# Altium PCB PCB.PcbDoc
Units mil, origin at the board's own origin, x right, y up, seen from the top; angles counter-clockwise.
Board outline 2283.46 x 1653.54 mil, 2 copper layers (Top Layer, Bottom Layer), stack 61.392 mil thick; 34 components, 22 nets, 85 pads, 33 vias.
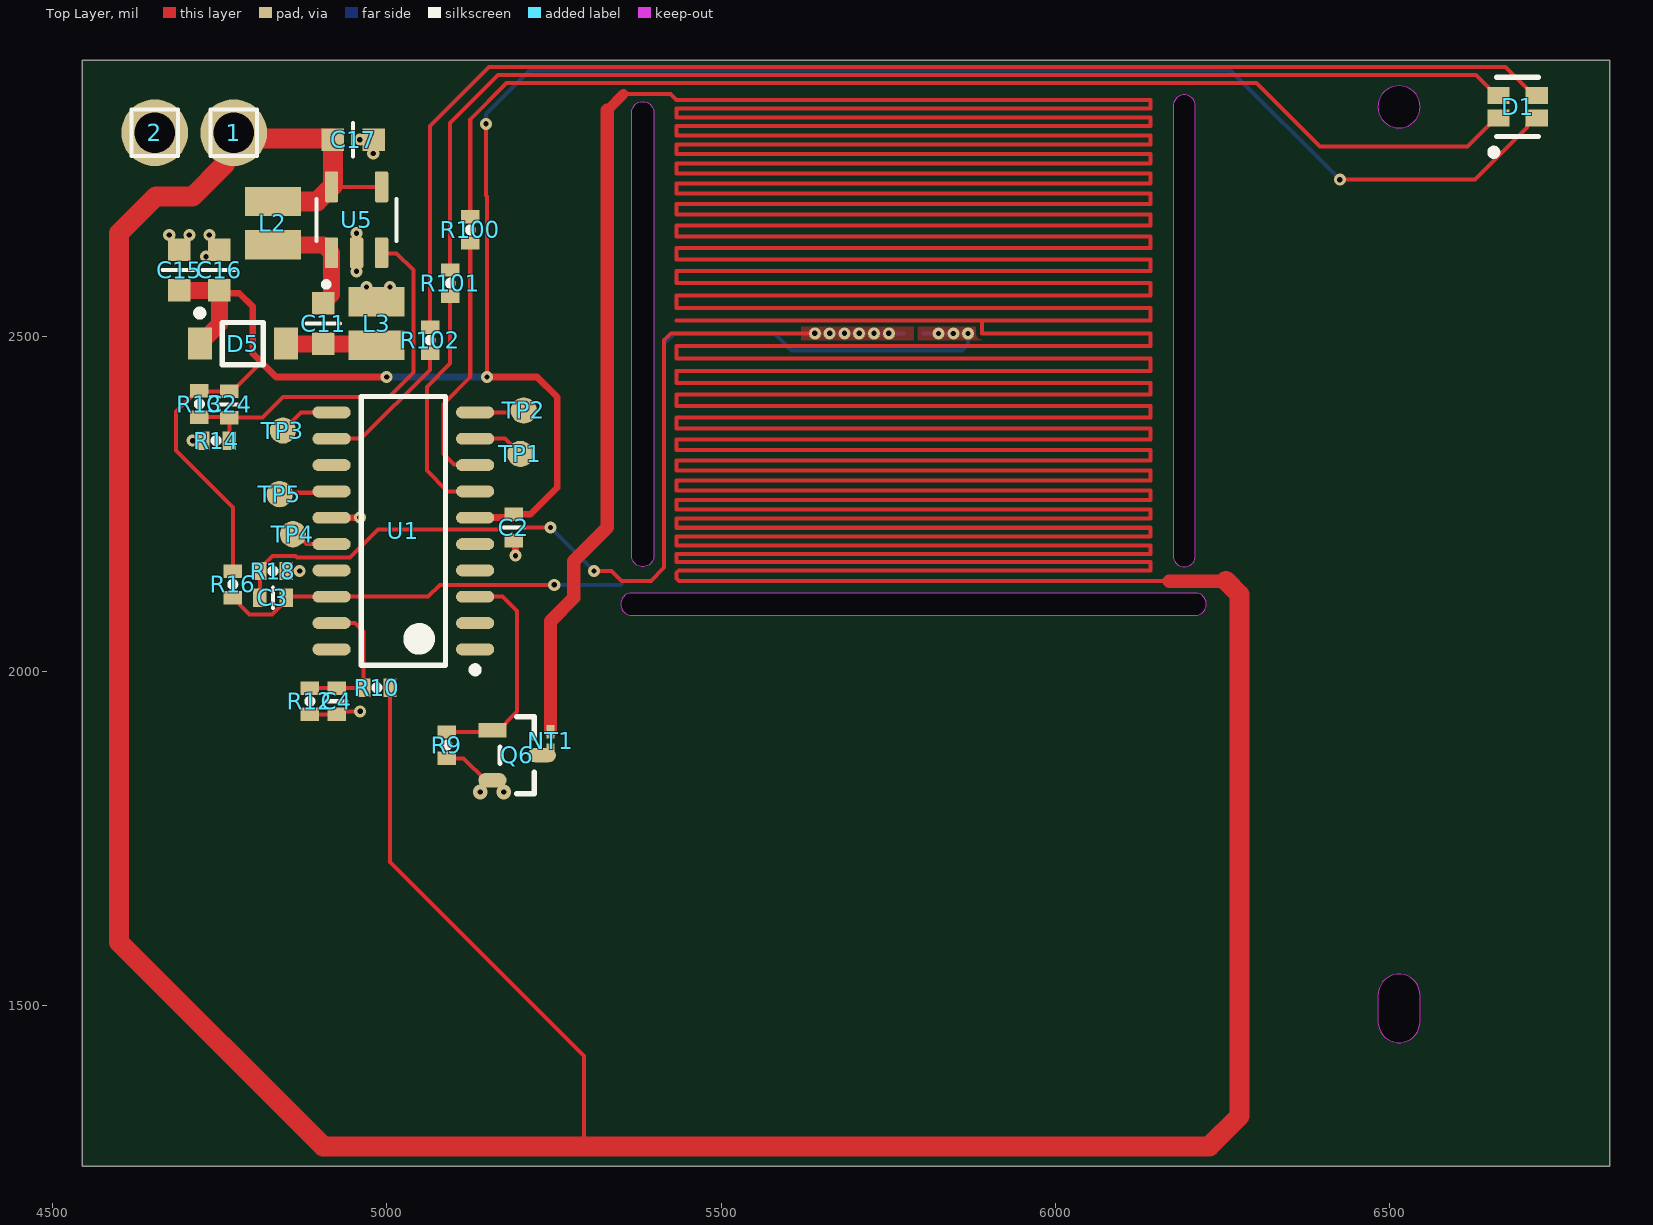
[diagram p0: Top Layer view]
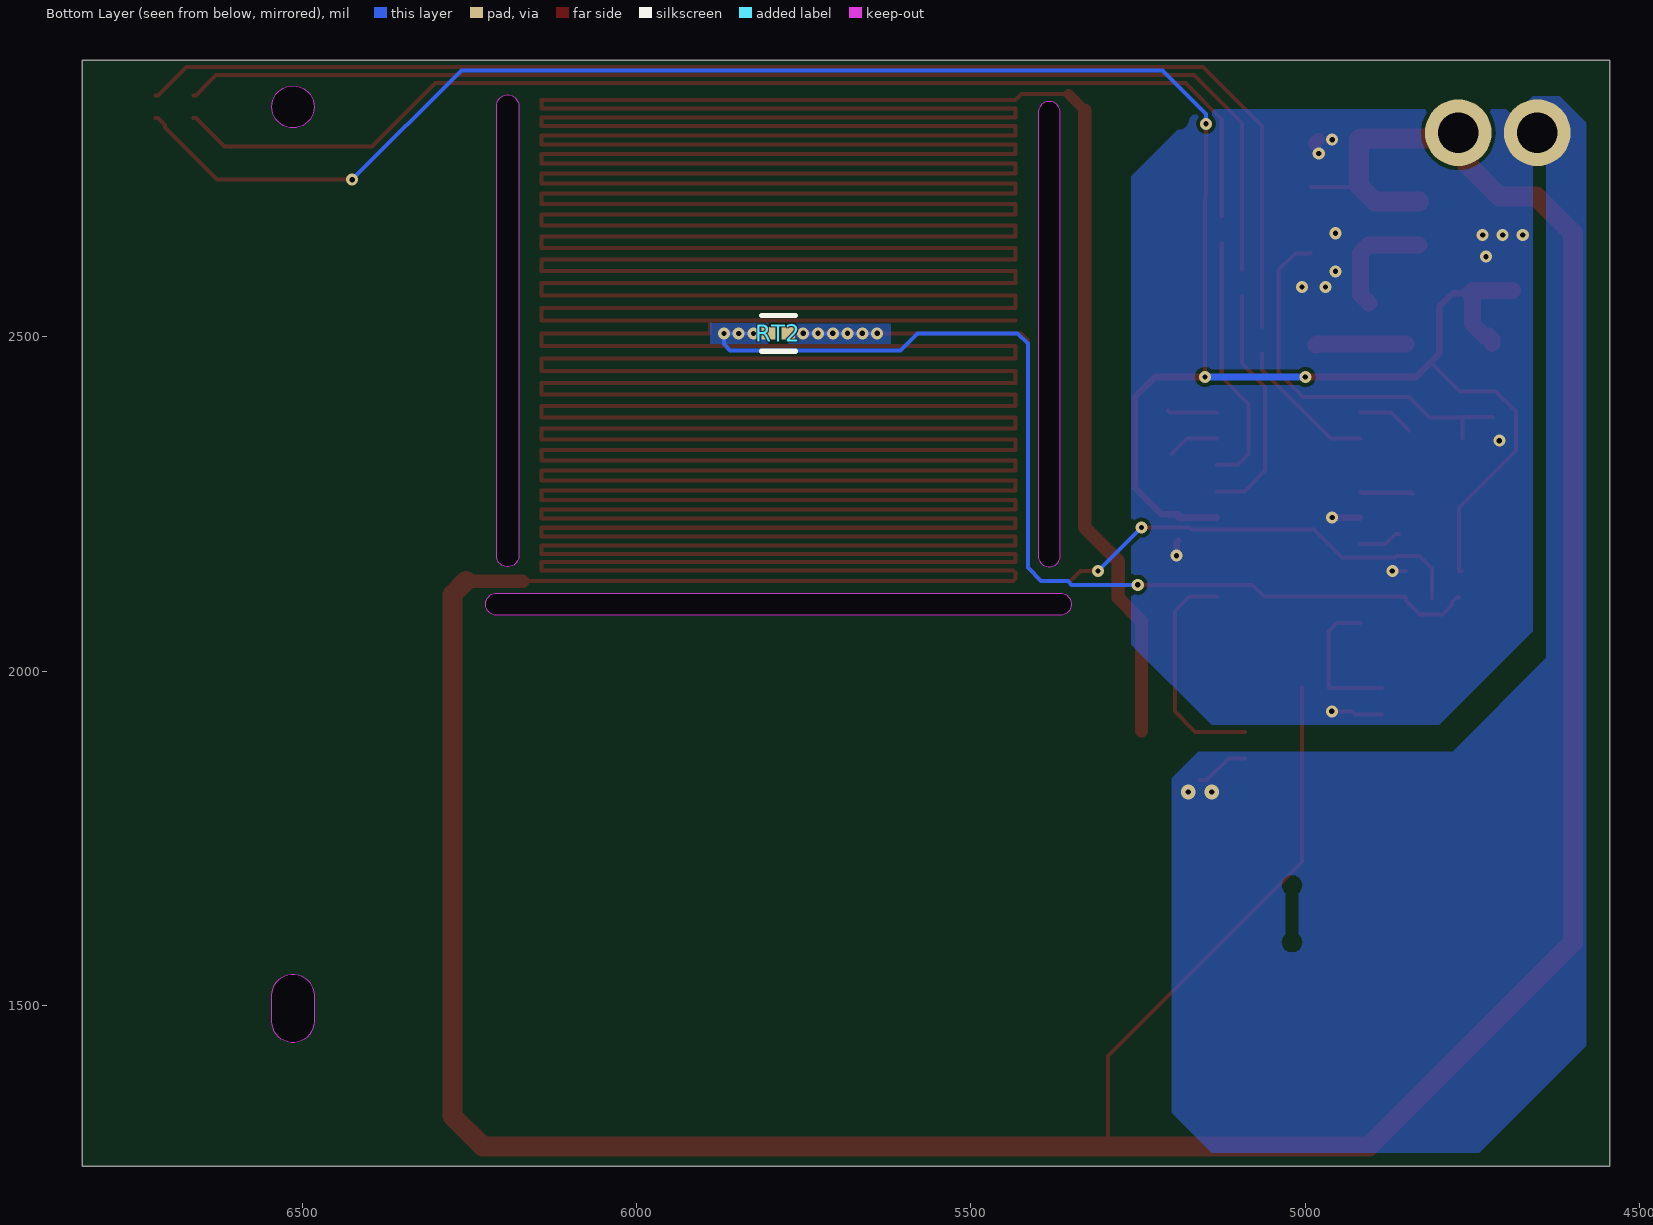
[diagram p1: Bottom Layer view, seen from below]
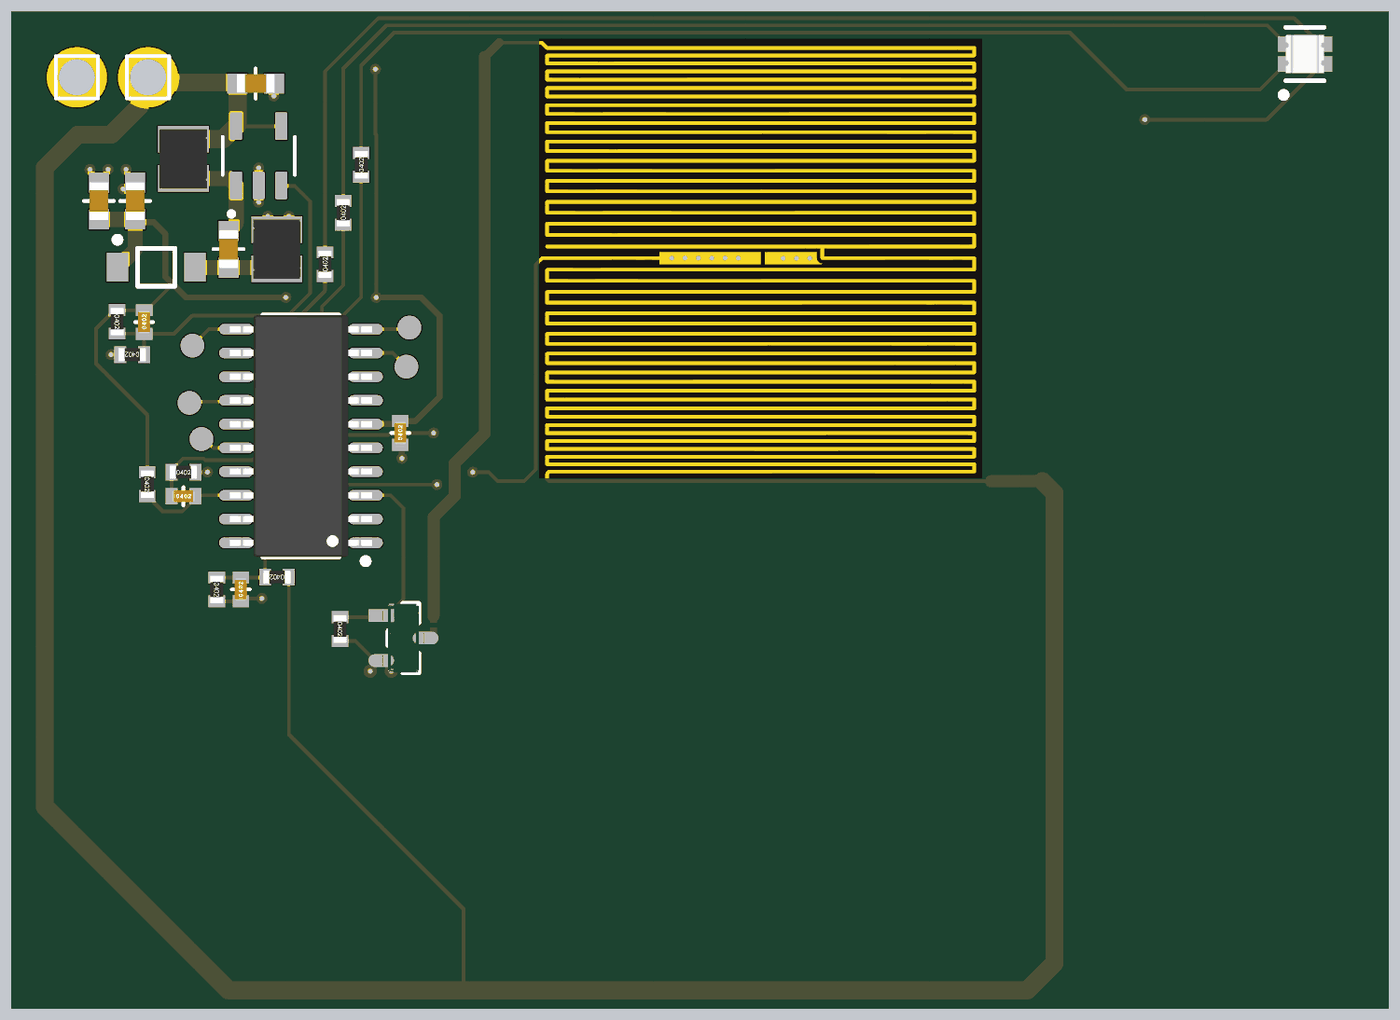
[diagram p2: 3D render of the assembled board from above, using the file's embedded part models]

## Layer stack, top to bottom
Top Solder: solder mask 0.8, Solder Resist, Dk 3.5
Top Layer: signal copper 1.378
Core: core 58.6362, Core-043, Dk 4.3
Bottom Layer: signal copper 1.378
Bottom Solder: solder mask 0.8, Solder Resist, Dk 3.5

## Board outline
4545,1260 6828.46,1260 6828.46,2913.54 4545,2913.54
cut-out: 5366.39,2172.82 5366.39,2835.35 cw(c5382.89,2835.35) 5399.39,2835.35 5399.39,2172.82 cw(c5382.89,2172.82)
cut-out: 5366.39,2083.95 6209.04,2083.95 ccw(c6209.04,2100.45) 6209.04,2116.95 5366.39,2116.95 ccw(c5366.39,2100.45)
cut-out: 6176.04,2172.82 ccw(c6192.54,2172.82) 6209.04,2172.82 6209.04,2845.35 ccw(c6192.54,2845.35) 6176.04,2845.35
cut-out: 6482.01,2843.94 ccw(c6513.5,2843.94) 6513.5,2812.44 ccw(c6513.5,2843.94) 6545,2843.94 ccw(c6513.5,2843.94) 6513.5,2875.44 ccw(c6513.5,2843.94)
cut-out: 6482.01,1476.54 ccw(c6513.5,1476.54) 6545,1476.54 6545,1515.91 ccw(c6513.5,1515.91) 6482.01,1515.91

## Design rules (kind name [scope] priority, off if disabled: settings)
AssemblyTestPointUsage [All] p1 off:
AssemblyTestpoint [All] p1 off: testpointundercomponent=TRUE minsize=40 maxsize=100 preferedsize=60 minholesize=0 maxholesize=40 preferedholesize=32 testpointgrid=1 usegrid=TRUE gridtolerance=0.01 allowsidetop=TRUE allowsidebottom=TRUE
BoardOutlineClearance BoardOutlineClearance-Silk [(OnLayer('Top Overlay') OR OnLayer('Bottom Overlay'))] p1 off: gap=3 ignorepadtopadclearanceinfootprint=FALSE
BoardOutlineClearance [All] p2 off: gap=30 ignorepadtopadclearanceinfootprint=FALSE except(0: Arc-SplitContinuation Track-SplitContinuation SMDPad-SplitContinuation THPad-SplitContinuation Via-SplitContinuation Fill-SplitContinuation Poly-SplitContinuation Region-SplitContinuation Text-OutlineEdge Text-CavityEdge Text-CutoutEdge Text-SplitBarrior Text-SplitContinuation)
Clearance Clearance_KeepOut [IsKeepOut] p1: gap=0.1 ignorepadtopadclearanceinfootprint=FALSE // Clearance for KeepOuts
Clearance [All] p2: gap=6 ignorepadtopadclearanceinfootprint=FALSE except(10: Arc-Hole Track-Hole SMDPad-Hole THPad-Hole Via-Hole Fill-Hole Poly-Hole Region-Hole Text-Hole)
ComponentClearance [All] p1: gap=1 collisioncheckmode=3 verticalgap=10 showdistances=FALSE
DiffPairsRouting DiffPairsRouting-090 [InDifferentialPairClass('All Differential Pairs')] p1 off: maxlimit=20 minlimit=20 mostfreqgap=20 toplayer_minwidth=5 toplayer_maxwidth=59.18 toplayer_prefwidth=42.58 bottomlayer_minwidth=5 bottomlayer_maxwidth=59.18 bottomlayer_prefwidth=42.58 maxuncoupledlength=500
DiffPairsRouting DiffPairsRouting-100 [InDifferentialPairClass('All Differential Pairs')] p2 off: maxlimit=25 minlimit=25 mostfreqgap=25 toplayer_minwidth=5 toplayer_maxwidth=52.19 toplayer_prefwidth=36.98 bottomlayer_minwidth=5 bottomlayer_maxwidth=52.19 bottomlayer_prefwidth=36.98 maxuncoupledlength=500
FabricationTestPointUsage TestPointUsage [All] p1 off: valid=0 allowmultiple=FALSE
FabricationTestpoint Testpoint [All] p1 off: side=3 testpointundercomponent=TRUE minsize=40 maxsize=100 preferedsize=60 minholesize=0 maxholesize=40 preferedholesize=32 testpointgrid=1 allowsidetop=TRUE allowsidebottom=TRUE usegrid=TRUE gridtolerance=0.01
Height 30mil [TouchesRoom('HeightMax_30mil')] p1: minheight=0 maxheight=30 prefheight=20
Height [All] p2: minheight=0 maxheight=2000 prefheight=500
HoleSize [All] p1: absolutevalues=TRUE maxlimit=500 minlimit=8 maxpercent=80.000 minpercent=20.000
HoleToHoleClearance [All] p1: gap=11.25 allowstackedmicrovias=TRUE
MaxMinImpedance [All] p1: minimum=10.00 maximum=150.0
MinimumAnnularRing MinimumAnnularRing_J1 [InComponent('J1')] p1: minimumring=3.25
MinimumAnnularRing MinimumAnnularRing_Lrg_Pad [IsPad and HoleDiameter > 75] p2: minimumring=30
MinimumAnnularRing MinimumAnnularRing_Via [IsVia] p3: minimumring=5
MinimumAnnularRing MinimumAnnularRing_Sml_Pad [All] p4: minimumring=10
MinimumSolderMaskSliver [All] p1: minsoldermaskwidth=4.75
PlaneClearance [All] p1: clearance=15
PlaneConnect [All] p1: planeconnectstyle=Direct reliefexpansion=0 reliefentries=4 reliefconductorwidth=20 reliefairgap=15
PolygonConnect [All] p1: connectstyle=Direct reliefconductorwidth=20 reliefentries=4 polygonreliefangle="45 Angle" airgapwidth=15
RoomDefinition top [InComponentClass('top')] p1 off: confinementstyle=ConfineIn formatcopy=TRUE lockcomponents=FALSE outline 3420,1600 4660,1600 4660,3070 3420,3070
RoutingCorners [All] p1: cornerstyle=45-Degree minsetback=50 maxsetback=50
RoutingVias Via16D32P [All] p1 off: holewidth=16 width=32 viastyle="Through Hole" minholewidth=16 minwidth=32 maxholewidth=16 maxwidth=32
RoutingVias Via12D26P [All] p2 off: holewidth=12 width=26 viastyle="Through Hole" minholewidth=12 minwidth=26 maxholewidth=12 maxwidth=26
RoutingVias Via10D24P [All] p3: holewidth=10 width=24 viastyle="Through Hole" minholewidth=10 minwidth=24 maxholewidth=10 maxwidth=24 useviatemplates=TRUE viatemplateguid#1={15CFB266-487C-44A9-9F42-8BFB84417FAA} viatemplateguid#2={545C9F35-7B06-41DF-9792-B915D163C373} viatemplatename#1=v22h08m13 viatemplatename#2=v24h10m24
RoutingVias Via08D22P [All] p4: holewidth=8 width=18 viastyle="Through Hole" minholewidth=8 minwidth=18 maxholewidth=8 maxwidth=18 viatemplateguid#1={15CFB266-487C-44A9-9F42-8BFB84417FAA} viatemplateguid#2={545C9F35-7B06-41DF-9792-B915D163C373} viatemplatename#1=v22h08m13 viatemplatename#2=v24h10m24
RoutingVias Via20D40P [All] p5 off: holewidth=24 width=40 viastyle="Through Hole" minholewidth=24 minwidth=40 maxholewidth=24 maxwidth=40
SilkToSilkClearance [All] p1 off: silktosilkclearance=0
SilkToSolderMaskClearance SilkscreenOverComponentPads [IsPad] p1 off: minsilkscreentomaskgap=0 clearancetoexposedcopper=FALSE
SolderMaskExpansion [All] p1: expansion=2 istentingtop=FALSE
UnRoutedNet [All] p1: checkbadconnections=TRUE
UnpouredPolygon [All] p1: allowunpoured=TRUE allowshelved=TRUE
Width Width_Serpentine [InNetClass('Heaters')] p1: maxlimit=250 minlimit=5 preferedwidth=19.68 bottomlayer_prefwidth=12 minimp=50.000000 maximp=50.000000 favimp=50.000000
Width Width_Pwr [InNetClass('Pwr')] p2: maxlimit=250 minlimit=5 preferedwidth=20 minimp=50.000000 maximp=50.000000 favimp=50.000000
Width [All] p3: maxlimit=250 minlimit=5 preferedwidth=8
13 further rules are at their usual default settings.

## Components (designator, comment, footprint, x,y, rotation, side; value= is the part's Value field where it differs from the comment)
1 "TP-TH-C-152-H90" TP-TH-C-152-H90 4771.38,2805.28 r90 top
2 "TP-TH-C-152-H90" TP-TH-C-152-H90 4653.27,2805.28 r90 top
C2 "0.10µF" SMD-0402C 5190,2215 r270 top
C3 "0.10µF" SMD-0402C 4830,2110 r180 top
C4 "0.10µF" SMD-0402C 4925.32,1955.32 r270 top
C11 "4.7µF" SMD-0603C 4905,2520 r0 top
C15 "4.7µF" SMD-0603C 4690,2600 r180 top
C16 "4.7µF" SMD-0603C 4750,2600 r180 top
C17 "4.7µF" SMD-0603C 4950,2795 r90 top
C24 "10pF" SMD-0402C 4765,2399.06 r270 top
D1 "LTST-C19HE1WT" FP-LTST-C19HE1WT-MFG 6690.67,2843.94 r90 top locked
D5 "BAT54T1" ONSC-SOD-123-2-425-04_V 4785,2490 r0 top
L2 "SDET25201B-100MS" "WE-LQS 252012"#1 4830,2670 r270 top
L3 "SDET25201B-100MS" "WE-LQS 252012"#2 4985,2520 r90 top
NT1 "2 way net tie junction" 2way_LP 5245,1896 r270 top net-tie
Q6 "NDS355AN / YJL3400A" FP-527AG-01-IPC_C 5195,1874.68 r0 top
R9 "10k" SMD-0402-RES 5090,1889.68 r90 top
R10 "100k" SMD-0402-RES 4985.32,1975.63 r0 top
R12 "100k" SMD-0402-RES 4885.32,1955.32 r90 top
R13 "47k" SMD-0402-RES 4720,2399.68 r90 top value=10k
R14 "28k" SMD-0402-RES 4745,2345 r0 top value=10k
R16 "3.3k" SMD-0402-RES 4770,2130 r90 top
R18 "0.0" SMD-0402-RES 4830,2150 r180 top
R100 "1k" SMD-0402-RES 5125,2660 r270 top
R101 "1k" SMD-0402-RES 5095,2580.32 r270 top
R102 "1k" SMD-0402-RES 5065,2495 r270 top
RT2 "NCP15XH103F03RC" FP-NCP15-NCU15-0_05-IPC_C 5787.72,2505.28 r0 bottom
TP1 "TP-SM-C-100" TP-SM-C-100 5200,2325 r90 top
TP2 "TP-SM-C-100" TP-SM-C-100 5205,2390 r90 top
TP3 "TP-SM-C-100" TP-SM-C-100 4845,2360 r90 top
TP4 "TP-SM-C-100" TP-SM-C-100 4860,2205 r90 top
TP5 "TP-SM-C-100" TP-SM-C-100 4840,2265 r90 top
U1 "PFS123-H20" TSOP100P600X135-20N 5025,2210 r180 top
U5 "AP3015AKTR-G1" SOT95P280X145-5N 4955,2675 r90 top

## Footprints (in the part's own frame and the unit in brackets; to place one, negate y for a bottom-side part, rotate by r counter-clockwise, add the part's x,y. Pads: shape width x height; smd on the part's side, far side on the other; paste and mask are expansions set on the pad)
2way_LP [mil] "2 way low power net tie junction"
  rrect5% 20x12 smd paste-100 mask+4: 1(-14,0) 2(14,0)
FP-527AG-01-IPC_C [mm]
  rect 1.075x0.538 smd paste+0 mask+0: 1(-0.935,0.95)
  rrect100% 1.075x0.538 smd paste+0 mask+0: 2(-0.935,-0.95) 3(0.935,0)
  silkscreen extent -0.65,-1.46 0.65,1.46, body extent -1.57,-1.56 1.57,1.56, height 0.25
FP-LTST-C19HE1WT-MFG [mm]
  rect 0.65x0.85 smd paste+0 mask+0: 1(-0.425,0.725) 2(0.425,0.725) 3(0.425,-0.725) 4(-0.425,-0.725)
  silkscreen extent -1.85,-0.8 1.12,1.02, body extent -0.95,-1.25 0.95,1.25, height 0.25
FP-NCP15-NCU15-0_05-IPC_C [mil]
  rect 20.29x18.6 smd paste+0 mask+0: 1(-14.9,0) 2(14.9,0)
  silkscreen extent -25,-27 25,27, body extent -20,-10 20,10, height 22
ONSC-SOD-123-2-425-04_V [mm] "SOD, 2-Leads, Body 2.69x1.6mm"
  rect 0.91x1.22 smd: 1(-1.635,0) 2(1.635,0)
  silkscreen extent -1.76,-0.8 0.78,1.28, body extent -1.35,-0.8 1.35,0.8, height 1.35
SMD-0402-RES [mm]
  rect 0.508x0.7 smd mask+0.025: 1(-0.5,0) 2(0.5,0)
  silkscreen extent -0.08,-0.08 0.08,0.08, body extent -0.58,-0.28 0.57,0.27, height 0.41
SMD-0402C [mm]
  rect 0.508x0.7 smd mask+0: 1(-0.5,0) 2(0.5,0)
  silkscreen extent 0,-0.38 0,0.38, body extent -0.51,-0.25 0.51,0.25, height 0.51
SMD-0603C [mm]
  rect 0.85x0.85 smd: 1(0,0.775) 2(0,-0.775)
  silkscreen extent -0.64,0 0.64,0, body extent -0.4,-0.8 0.4,0.8, height 0.9
SOT95P280X145-5N [mm]
  rrect25% 1.17x0.51 smd: 1(-1.25,0.95) 2(-1.25,0) 3(-1.25,-0.95) 4(1.25,-0.95) 5(1.25,0.95)
  silkscreen extent -2.55,-1.52 0.8,1.52
TP-SM-C-100 [mm] "Test Point, Surface Mounting, Circular, Pad Diameter 1mm"
  round 1 smd: 1(0,0)
TP-TH-C-152-H90 [mil] "Test Point, Through Hole, Hole Size 0.9mm, PCB Mount with Silkscreen Box"
  round 100 hole 60: 1(0,0)
  silkscreen extent -35,-35 35,35
TSOP100P600X135-20N [mm] "TSOP, 20-Leads, Body 10.00x3.90mm, Pitch 1.00mm, IPC Medium Density"
  oval 1.45x0.45 smd: 1(-2.725,4.5) 2(-2.725,3.5) 3(-2.725,2.5) 4(-2.725,1.5) 5(-2.725,0.5) 6(-2.725,-0.5) 7(-2.725,-1.5) 8(-2.725,-2.5) 9(-2.725,-3.5) 10(-2.725,-4.5) 11(2.725,-4.5) 12(2.725,-3.5) 13(2.725,-2.5) 14(2.725,-1.5) 15(2.725,-0.5) 16(2.725,0.5) 17(2.725,1.5) 18(2.725,2.5) 19(2.725,3.5) 20(2.725,4.5)
  silkscreen extent -2.85,-5.1 1.6,5.4, body extent -3,-5.1 3,5.1, height 1.35
"WE-LQS 252012"#1 [mil] "SMD Power Inductor, 2-Leads, Body 2.5x2.0mm"
  rect 44x84 smd: 1(-32.48,0) 2(32.48,0)
  body extent -49,-39 49,39, height 46
"WE-LQS 252012"#2 [mil] "SMD Power Inductor, 2-Leads, Body 2.5x2.0mm"
  rect 44x84 smd: 1(-32.48,0)
  rect 44x84 smd paste+0: 2(32.48,0)
  body extent -49,-39 49,39, height 46

## Part data
1 2: "Test Point, Through Hole, Hole Size 0.9 mm, PCB Mount with Silkscreen Box"
C2 C3 C4: library part GRM152R61A104KE19D, "CAP CER 0.1UF 10V X5R 0402", Digi-Key Part Number=490-10008-1-ND, Manufacturer="Murata Electronics North America", Operating Temperature="-55°C ~ 85°C", Package / Case="0402 (1005 Metric)", Ratings=-, Temperature Coefficient=X5R, Tolerance=±10%, Voltage=10V, @ qty=0, Applications="General Purpose", Datasheets=http://www.murata.com/~/media/webrenewal/support/library/catalog/products/capacitor/mlcc/c02e.pdf, Factory Stock=0, Features="Derating Recommended", Height - Seated (Max)=-, Image=//media.digikey.com/Renders/Murata%20Renders/ZRB-SERIES-0402.jpg, Lead Spacing=-, Lead Style=-, Minimum Quantity=1, Mounting Type="Surface Mount, MLCC", Packaging="Cut Tape (CT)", Part Number=GRM152R61A104KE19D, Part Status=Active, Quantity Available=80241, Series=GRM, Size / Dimension="0.039\" L x 0.020\" W (1.00mm x 0.50mm)", Thickness (Max)="0.009\" (0.22mm)", Unit Price (USD)=0.16
C11 C15 C16 C17: library part GRM185C81A475KE11D, "CAP CER 4.7UF 10V X6S 0603", Digi-Key Part Number=490-10464-1-ND, Manufacturer="Murata Electronics North America", Operating Temperature="-55°C ~ 105°C", Package / Case="0603 (1608 Metric)", Ratings=-, Temperature Coefficient=X6S, Tolerance=±10%, Voltage=10V, @ qty=0, Applications="General Purpose", Datasheets=http://www.murata.com/~/media/webrenewal/support/library/catalog/products/capacitor/mlcc/c02e.pdf, Factory Stock=0, Features="Derating Recommended", Height - Seated (Max)=-, Image=//media.digikey.com/Renders/Murata%20Renders/ZRB-SERIES-0402.jpg, Lead Spacing=-, Lead Style=-, Minimum Quantity=1, Mounting Type="Surface Mount, MLCC", Packaging="Cut Tape (CT)", Part Number=GRM185C81A475KE11D, Part Status=Active, Quantity Available=1360, Series=GRM, Size / Dimension="0.063\" L x 0.031\" W (1.60mm x 0.80mm)", Thickness (Max)="0.022\" (0.55mm)", Unit Price (USD)=0.51
C24: library part GCM1555C1H100JA16D, "CAP CER 10PF 50V NP0 0402", Digi-Key Part Number=490-10668-1-ND, Manufacturer="Murata Electronics North America", Operating Temperature="-55°C ~ 125°C", Package / Case="0402 (1005 Metric)", Ratings=AEC-Q200, Temperature Coefficient="C0G, NP0", Tolerance=±5%, Voltage=50V, @ qty=0, Applications=Automotive, Datasheets=http://www.murata.com/~/media/webrenewal/support/library/catalog/products/capacitor/mlcc/c03e.ashx, Factory Stock=0, Features=-, Height - Seated (Max)=-, Image=//media.digikey.com/Renders/Murata%20Renders/ZRB-SERIES-0402.jpg, Lead Spacing=-, Lead Style=-, Minimum Quantity=1, Mounting Type="Surface Mount, MLCC", Packaging="Cut Tape (CT)", Part Number=GCM1555C1H100JA16D, Part Status=Active, Quantity Available=966, Series=GCM, Size / Dimension="0.039\" L x 0.020\" W (1.00mm x 0.50mm)", Thickness (Max)="0.022\" (0.55mm)", Unit Price (USD)=0.1
D1: library part CMP-2000-05201-2, "LED RGB DIFFUSED CHIP SMD", Case Code (Imperial)=0606, Case Code (Metric)=1616, Color=Blue, Forward Current=20mA, Forward Voltage=3.35V, Lens Color=White, Max Operating Temperature=80°C, Min Operating Temperature=-20°C, Package Quantity=3000, Reverse Voltage=5V, Case/Package=0606, Depth=1.6mm, Dominant Wavelength=470nm, Height=0.35mm, Lead Free="Lead Free", Length=1.6mm, Lens Style=Diffused, Lens Transparency=Diffused, Luminous Intensity=180mcd, Mount="Surface Mount", Number of Elements=3, Number of LEDs=3, Number of Pins=4, Packaging="Tape and Reel", Radiation Hardening=No, Test Current=20mA, Viewing Angle=130°, Width=1.6mm
D5: library part CMP-1055-00428-1, "Schottky Barrier Diode, 2-Pin SOD-123, Tape and Reel", Manufacturer="On Semiconductor", ComponentLink1Description="Manufacturer URL", ComponentLink1URL=http://www.onsemi.com/, ComponentLink2Description=Datasheet, ComponentLink2URL=http://www.onsemi.cn/pub_link/Collateral/BAT54T1-D.PDF, ComponentLink3Description="Package Specification", ComponentLink3URL=http://www.onsemi.com/pub_link/Collateral/425-04.PDF, Configuration=Single, DatasheetVersion="Rev. 9", IFSM Max (A)=0.6, Mounting Technology="Surface Mount", PackageDescription="2-Pin SOD, Body 1.6 x 2.69 mm", PackageReference=SOD-123-2-425-04, PackageVersion="Rev. G, 10/2009", Packing="Tape and Reel", PartNumber=BAT54T1, RoHS=FALSE, trr Max (ns)=5
L2 L3: library part CMP-1354-00007-1, "FIXED IND 10UH 900MA 408MOHM SMD", Inductance="10.0 ÂµH", Manufacturer="Wuerth Elektronik", PartNumber=74404024100, ComponentLink1Description="Manufacturer URL", ComponentLink1URL=http://www.we-online.com, ComponentLink2Description=Datasheet, ComponentLink2URL=http://katalog.we-online.de/pbs/datasheet/74404024100.pdf, PackageReference="WE-LQS 252012"
NT1: library part 2way, ComponentLink1Description=Source, ComponentLink1URL=http://www.edatools.cz/addons, FootprintNote="LP=12mil, MP=40mil, HP=120mil"
Q6: library part CMP-2000-06834-2, "MOSFET N-CH 30V 1.7A SSOT3", Continuous Drain Current=1.7A, Drain To Source Breakdown Voltage=30V, Drain To Source Resistance=0.105Ω, Gate To Source Voltage=20V, Input Capacitace At Vds="195pF @ 15V", Manufacturer="ON Semiconductor", Manufacturer Part Number=NDS355AN, Max Forward Diode Voltage=1.2V, Max Junction Temp=+150°C, Package=527AG-01, Power Dissipation=0.46W, Pulse Drain Current=10A, Temperature="-55°C to +150°C", Temperature Range Low=-55°C, Typ Forward Diode Voltage=0.8V, Automotive=No, Category=Trans, ComponentLink2Description=Datasheet, ComponentLink2URL=https://www.onsemi.com/pub/Collateral/NDS355AN-D.PDF, Depletion Mode=False, Device Class L1="Discrete Semiconductors", Device Class L2=Transistors, Device Class L3=MOSFETs, Digikey Description="MOSFET N-CH 30V 1.7A SSOT3", Drain To Source Voltage=30V, Footprint Url=https://www.onsemi.com/pub/Collateral/527AG.PDF, Gate Charge At Vgs="3.5nC @ 5V", Height=1.22mm, Lead Free=Yes, Mouser Description="MOSFET SOT-23 N-CH LOGIC", Number of Channels=1, Number Of N Channels=1, Octopart=https://octopart.com/nds355an-on+semiconductor-84330922, RoHS=TRUE, Rthja Max=250°C/W, Standoff Height=0.013mm, Temperature Range High=+150°C, Threshold Vgs Max=2V, Threshold Vgs Min=1V, Transconductance=3.5S, Turn Off Delay Time=13ns, Turn On Delay Time=10ns
R9 R13 R14: library part ERJ-2GEJ103X, "RES SMD 10K OHM 5% 1/10W 0402", Digi-Key Part Number=P10KJCT-ND, Manufacturer="Panasonic Electronic Components", Operating Temperature="-55°C ~ 155°C", Package / Case="0402 (1005 Metric)", Power (Watts)="0.1W, 1/10W", Supplier Device Package=0402, Temperature Coefficient=±200ppm/°C, Tolerance=±5%, @ qty=1500, Composition="Thick Film", Datasheets=http://industrial.panasonic.com/www-cgi/jvcr13pz.cgi?E+PZ+3+AOA0001+ERJ2GEJ103X+7+WW, Factory Stock=0, Failure Rate=-, Features="Automotive AEC-Q200", Height - Seated (Max)="0.016\" (0.40mm)", Image=//media.digikey.com/Photos/Panasonic%20Photos/ERJ-PA2-Series.jpg, Minimum Quantity=1, Number of Terminations=2, Packaging="Cut Tape (CT)", Part Number=ERJ-2GEJ103X, Part Status=Active, Quantity Available=2560215, Series=ERJ, Size / Dimension="0.039\" L x 0.020\" W (1.00mm x 0.50mm)", Unit Price (USD)=0.00350
R10 R12: library part ERJ-2GEJ104X, "RES SMD 100K OHM 5% 1/10W 0402", Digi-Key Part Number=P100KJCT-ND, Manufacturer="Panasonic Electronic Components", Operating Temperature="-55°C ~ 155°C", Package / Case="0402 (1005 Metric)", Power (Watts)="0.1W, 1/10W", Supplier Device Package=0402, Temperature Coefficient=±200ppm/°C, Tolerance=±5%, @ qty=1500, Composition="Thick Film", Datasheets=http://industrial.panasonic.com/www-cgi/jvcr13pz.cgi?E+PZ+3+AOA0001+ERJ2GEJ104X+7+WW, Factory Stock=0, Failure Rate=-, Features="Automotive AEC-Q200", Height - Seated (Max)="0.016\" (0.40mm)", Image=//media.digikey.com/Photos/Panasonic%20Photos/ERJ-PA2-Series.jpg, Minimum Quantity=1, Number of Terminations=2, Packaging="Cut Tape (CT)", Part Number=ERJ-2GEJ104X, Part Status=Active, Quantity Available=2387986, Series=ERJ, Size / Dimension="0.039\" L x 0.020\" W (1.00mm x 0.50mm)", Unit Price (USD)=0.00350
R16: library part ERJ-2GEJ332X, "RES SMD 3.3K OHM 5% 1/10W 0402", Digi-Key Part Number=P3.3KJCT-ND, Manufacturer="Panasonic Electronic Components", Operating Temperature="-55°C ~ 155°C", Package / Case="0402 (1005 Metric)", Power (Watts)="0.1W, 1/10W", Supplier Device Package=0402, Temperature Coefficient=±200ppm/°C, Tolerance=±5%, @ qty=1500, Composition="Thick Film", Datasheets=http://industrial.panasonic.com/www-cgi/jvcr13pz.cgi?E+PZ+3+AOA0001+ERJ2GEJ332X+7+WW, Factory Stock=0, Failure Rate=-, Features="Automotive AEC-Q200", Height - Seated (Max)="0.016\" (0.40mm)", Image=//media.digikey.com/Photos/Panasonic%20Photos/ERJ-PA2-Series.jpg, Minimum Quantity=1, Number of Terminations=2, Packaging="Cut Tape (CT)", Part Number=ERJ-2GEJ332X, Part Status=Active, Quantity Available=514266, Series=ERJ, Size / Dimension="0.039\" L x 0.020\" W (1.00mm x 0.50mm)", Unit Price (USD)=0.00350
R18: library part ERJ-2GE0R00X, "RES SMD 0.0OHM JUMPER 1/10W 0402", Digi-Key Part Number=P0.0JCT-ND, Manufacturer="Panasonic Electronic Components", Operating Temperature="-55°C ~ 155°C", Package / Case="0402 (1005 Metric)", Power (Watts)="0.1W, 1/10W", Supplier Device Package=0402, Temperature Coefficient=-, Tolerance=Jumper, @ qty=1500, Composition="Thick Film", Datasheets=http://industrial.panasonic.com/www-cgi/jvcr13pz.cgi?E+PZ+3+AOA0001+ERJ2GE0R00X+7+WW, Factory Stock=0, Failure Rate=-, Features="Automotive AEC-Q200", Height - Seated (Max)="0.016\" (0.40mm)", Image=//media.digikey.com/Photos/Panasonic%20Photos/ERJ-PA2-Series.jpg, Minimum Quantity=1, Number of Terminations=2, Packaging="Cut Tape (CT)", Part Number=ERJ-2GE0R00X, Part Status=Active, Quantity Available=3152483, Series=ERJ, Size / Dimension="0.039\" L x 0.020\" W (1.00mm x 0.50mm)", Unit Price (USD)=0.00384
R100 R101 R102: library part ERJ-2GEJ102X, "RES SMD 1K OHM 5% 1/10W 0402", Digi-Key Part Number=P1.0KJCT-ND, Manufacturer="Panasonic Electronic Components", Operating Temperature="-55°C ~ 155°C", Package / Case="0402 (1005 Metric)", Power (Watts)="0.1W, 1/10W", Supplier Device Package=0402, Temperature Coefficient=±200ppm/°C, Tolerance=±5%, @ qty=1500, Composition="Thick Film", Datasheets=http://industrial.panasonic.com/www-cgi/jvcr13pz.cgi?E+PZ+3+AOA0001+ERJ2GEJ102X+7+WW, Factory Stock=0, Failure Rate=-, Features="Automotive AEC-Q200", Height - Seated (Max)="0.016\" (0.40mm)", Image=//media.digikey.com/Photos/Panasonic%20Photos/ERJ-PA2-Series.jpg, Minimum Quantity=1, Number of Terminations=2, Packaging="Cut Tape (CT)", Part Number=ERJ-2GEJ102X, Part Status=Active, Quantity Available=1939857, Series=ERJ, Size / Dimension="0.039\" L x 0.020\" W (1.00mm x 0.50mm)", Unit Price (USD)=0.00350
RT2: library part CMP-06022-000003-3, "NTC Thermistor for Temperature Sensor, 0402, 10kΩ, 1%, 0.1mA, 5V", Case Code (Imperial)=0402, Case Code (Metric)=1005, Current Rating=310uA, Max Operating Temperature=125°C, Max Power Dissipation=100mW, Min Operating Temperature=-40°C, Package Quantity=10000, Resistance=10kR, Resistance Tolerance=1%, Case/Package=0402, Depth=0.5mm, Height=0.5mm, Lead Free="Lead Free", Length=1mm, Mount="Surface Mount", Number of Pins=2, Packaging="Tape and Reel", Power Rating=100mW, Radiation Hardening=No, REACH SVHC="No SVHC", RoHS Compliant=Yes, Series=NCP, Termination=SMD/SMT, Tolerance=1%
TP1 TP2 TP3 TP4 TP5: library part CMP-0484-00002-2, "Test Point, Surface Mount, Circular, Pad Diameter 1 mm", Manufacturer="No Vendor", PartNumber=TP-SM-C-100
U5: "Boost Switching Regulator IC Positive Adjustable 1.23V 1 Output 75mA (Switch) SC-74A, SOT-753", Package="SOT-23-5 Diodes Inc.", Availability=Good, Check_prices=https://www.snapeda.com/parts/AP3015AKTR-G1/Diodes%20Inc./view-part/490813/?ref=eda, DigiKey-Purchase-URL=https://snapeda.com/shop?store=DigiKey&id=490813, MF="Diodes Inc.", Mouser-Purchase-URL=https://snapeda.com/shop?store=Mouser&id=490813, MP=AP3015AKTR-G1, Price=None, SnapEDA_Link=https://www.snapeda.com/parts/AP3015AKTR-G1/Diodes%20Inc./view-part/490813/?ref=snap

## Via types
v1: diameter 18, hole 8, Top Layer to Bottom Layer, tented both sides, 31 vias
v2: diameter 22, hole 8, Top Layer to Bottom Layer, tented both sides, 2 vias

## Nets (pads, with @x,y where several pads share a name; then routed paths per layer and width w, separated by ;. In a path a pad name is that pad's centre, name@x,y a point inside that pad or via, vN(x,y) a via of type N, cw(c..) or ccw(c..) an arc to the next point about the centre after c; other vN are vias at no path point)
GND: 2.1 C2.2 C4.2 C15.2 C16.2 C17.2 L3.2 Q6.2 R9.1 R12.1 R14.1 R18.1 U1.15 U5.2 | length 257.1
  Top Layer w6: R18.1 v1(4870,2150) ; R12.1 C4.2 ; U1.15 U1.15@4917.87,2229.84 ; C4.2@4925.47,1935.79 4930,1940.32 v1(4960.32,1940.32) ; v1@4959.84,2229.84 v1(4960,2230) ; R9.1 5114.91,1870 5147.63,1837.28 Q6.2 ; v1(5192.63,2172.99) v1@5195.62,2170
  Top Layer w10: U1.15@4917.87,2229.84 v1@4959.84,2229.84 ; C2.2 5192.63,2192.68 v1(5192.63,2172.99)
  Top Layer w20: C17.2 C17.2@4986.34,2789.18
  other v1: 4710,2345 4970,2574.61 5005,2574.61 4955,2598 4730,2620 4675,2652.4 4705,2652.4 4735,2652.4 4955,2655 4980,2774.17 4960,2795
  other v2: 5140,1819.68 5175,1819.68
HEATER_PWM1: Q6.1 R9.2 U1.3 | length 339.5
  Top Layer w6: R9.2 5164.69,1909.37 5195,1939.68 5195,2090 5173.43,2111.57 U1.3
ICPCK: TP3.1 U1.11 | length 84
  Top Layer w6: TP3.1 4872.17,2387.17 U1.11
ICPDA: TP1.1 U1.9 | length 77.2
  Top Layer w6: U1.9 5177.2,2347.8 TP1.1
ICVPP: TP2.1 U1.10 | length 73.9
  Top Layer w6: U1.10 5202.17,2387.17 TP2.1
LED_BLUEn: R102.2 U1.12 | length 214.5
  Top Layer w6: U1.12 4962.01,2347.8 5064.83,2450.62 5064.83,2475.14 R102.2
LED_GRNn: R101.2 U1.7 | length 360.2
  Top Layer w6: R101.2 5095,2460 5060,2425 5060,2300 5090.94,2269.06 U1.7
LED_REDn: R100.2 U1.8 | length 386
  Top Layer w6: R100.2 5125,2440 5085,2400 5085,2325 5100.46,2309.54 5131.17,2309.54 U1.8
NetC11_1: C11.1 L2.2 U5.1 | length 173
  Top Layer w25: L2.2 4905.87,2637.52 U5.1 4917.6,2563.11 C11.1
NetC11_2: C11.2 D5.2 L3.1 | length 136.5
  Top Layer w25: D5.2@4849.37,2489.37 4904.88,2489.37 C11.2 4983.03,2489.49 L3.1
NetC24_2: C24.2 R13.1 R14.2 U5.3 | length 589.8
  Top Layer w6: R13.1 C24.2@4765,2380 ; R14.2@4765,2349.06 C24.2 4814.37,2379.37 4845,2410 5003.28,2410 5040,2446.72 5040,2600 5015,2625 4993.19,2625 U5.3
NetD1_1: D1.1 R100.1 | length 1761.5
  Top Layer w6: R100.1 5125,2825 5179.35,2879.35 6300.65,2879.35 6395,2785 6615.98,2785 6658.19,2827.21 D1.1
NetD1_2: D1.2 R101.1 | length 1830
  Top Layer w6: R101.1 5095,2820 5166.35,2891.35 6628.49,2891.35 6648.39,2871.45 6648.39,2870.47 6658.19,2860.67 D1.2
NetD1_3: D1.3 R102.1 | length 2008.8
  Top Layer w6: R102.1 5065,2815 5153.35,2903.35 6672.6,2903.35 6715.28,2860.67 D1.3
NetNT1_2: NT1.2 Q6.3
RXD: TP4.1 U1.16 | length 63.8
  Top Layer w6: TP4.1 4865.49,2205 4880.17,2190.31 U1.16
TEMP1_N: C3.2 R18.2 RT2.1 | length 1419.6
  Top Layer w6: C3.2 4810.32,2153.78 4829.32,2172.78 4863.41,2172.78 4866.19,2170 4945,2170 4986.83,2211.83 5170,2211.83 5173.18,2215 v1(5245,2215) ; v1(5310,2150) 5336.23,2150 5351.23,2135 5395,2135 5415,2155 5415,2495 5425.28,2505.28 v1(5640.19,2505.28)
  Bottom Layer w6: v1(5245,2215) v1(5310,2150) ; v1(5640.19,2505.28) v1(5662.29,2505.28) v1(5684.4,2505.28) v1(5706.5,2505.28) v1(5728.6,2505.28) v1(5750.71,2505.28) RT2.1
TEMP1_P: C3.1 R16.1 RT2.2 U1.18 | length 1581
  Top Layer w6: R16.1 4773.78,2110.32 4780.78,2103.32 4780.78,2099.54 4795.32,2085 4828.46,2085 4849.68,2106.22 C3.1 4851.26,2111.57 U1.18 5061.57,2111.57 5079.43,2129.43 v1(5250.57,2129.43)
  Bottom Layer w6: v1(5250.57,2129.43) 5349.43,2129.43 5355,2135 5395,2135 5415,2155 5415,2490 5430,2505 5580,2505 5605,2480 5860,2480 5869.21,2489.21 v1(5869.21,2505) v1(5847.1,2505) v1(5825,2505) 5802.9,2505 RT2.2
TXD: TP5.1 U1.14 | length 79.4
  Top Layer w6: TP5.1 4842.03,2267.03 4915.69,2267.03 U1.14
V_BATT: 1.1 C17.1 L2.1 NT1.1 R10.2 U5.4 U5.5 | length 39881.1
  Top Layer w6: 4932.6,2724.21 U5.4 ; R10.2 5005,1715 5295,1425 5295,1290 ; 5353.85,2862.85 5424.52,2862.85 5433.39,2853.98 6142.05,2853.98 6142.05,2841.24 5433.39,2841.24 5433.39,2828.24 6142.05,2828.24 6142.05,2814.97 5433.39,2814.97 5433.39,2801.44 6142.05,2801.44 6142.05,2787.63 5433.39,2787.63 5433.39,2773.54 6142.05,2773.54 6142.05,2759.17 5433.39,2759.17 5433.39,2744.51 6142.05,2744.51 6142.05,2729.54 5433.39,2729.54 5433.39,2714.28 6142.05,2714.28 6142.05,2698.71 5433.39,2698.71 5433.39,2682.82 6142.05,2682.82 6142.05,2666.61 5433.39,2666.61 5433.39,2650.07 6142.05,2650.07 6142.05,2633.2 5433.39,2633.2 5433.39,2615.98 6142.05,2615.98 6142.05,2598.42 5433.39,2598.42 5433.39,2580.5 6142.05,2580.5 6142.05,2562.22 5433.39,2562.22 5433.39,2543.57 6142.05,2543.57 6142.05,2524.54 5890,2524.54 5433.39,2524.54 ; 5890,2524.31 5890,2505.28 6142.05,2505.28 ; 6142.05,2505.12 6142.05,2486.09 5433.39,2486.09 5433.39,2467.44 6142.05,2467.44 6142.05,2449.16 5433.39,2449.16 5433.39,2431.24 6142.05,2431.24 6142.05,2413.68 5433.39,2413.68 5433.39,2396.46 6142.05,2396.46 6142.05,2379.59 5433.39,2379.59 5433.39,2363.05 6142.05,2363.05 6142.05,2346.84 5433.39,2346.84 5433.39,2330.95 6142.05,2330.95 6142.05,2315.38 5433.39,2315.38 5433.39,2300.12 6142.05,2300.12 6142.05,2285.16 5433.39,2285.16 5433.39,2270.49 6142.05,2270.49 6142.05,2256.12 5433.39,2256.12 5433.39,2242.03 6142.05,2242.03 6142.05,2228.22 5433.39,2228.22 5433.39,2214.69 6142.05,2214.69 6142.05,2201.42 5433.39,2201.42 5433.39,2188.42 6142.05,2188.42 6142.05,2175.68 5433.39,2175.68 5433.39,2163.19 6142.05,2163.19 6142.05,2150.94 5436.9,2150.94 5433.39,2147.43 5433.39,2138.49 5436.9,2134.97 6170.03,2134.97
  Top Layer w15: 5330,2839 5353.85,2862.85
  Top Layer w20: NT1.1@5245,1911.5 5245,2075 5280,2110 5280,2165 5330,2215 5330,2839 ; 6170.03,2134.97 6255.03,2134.97
  Top Layer w30: L2.1 4895.87,2702.48 U5.5 4920,2726.61 C17.1@4920,2790.51 ; C17.1 4917.76,2796.73 4779.92,2796.73 1.1 4757.98,2791.88 4757.98,2757.98 4710,2710 4655,2710 4600,2655 4600,1595 4905,1290 5295,1290 6230,1290 6275,1335 6275,2115 6255.03,2134.97
VBATT_MON: C4.1 R10.1 R12.2 U1.19 | length 217.5
  Top Layer w6: R12.2 C4.1 4965,1975 R10.1 4965.63,2059.37 4952.8,2072.2 U1.19
VDD: C2.1 C15.1 C16.1 C24.1 D1.4 D5.1 R13.2 R16.2 U1.6 | length 3579.7
  Top Layer w6: R16.2@4766.22,2149.68 R16.2 4770,2245 4685,2330 4685,2388.15 4715.59,2418.74 C24.1 4768.78,2418.74 4808.84,2458.8 4816.01,2458.8 ; v1(5148.58,2818.58) 5148.58,2711.42 5150,2710 v1(5150,2440) ; v1(6425,2735) 6627.01,2735 6704.98,2812.97 6704.98,2816.91 6715.28,2827.21 D1.4
  Top Layer w10: C16.1@4754.23,2565.26 4779.74,2565.26 4800,2545 4800,2474.81 4816.01,2458.8 4834.81,2440 v1(5000,2440) ; U1.6 5132.6,2230 5189.68,2230 C2.1@5190,2230.32 ; v1(5150,2440) 5225,2440 5255,2410 5255,2275 5214.68,2234.68 C2.1
  Top Layer w25: C15.1 C16.1 ; D5.1 4720.63,2496.1 4726.04,2501.52 4732.15,2501.52 4750,2519.37 C16.1 ; C16.1@4754.23,2565.26 C16.1
  Bottom Layer w6: v1(5148.58,2818.58) 5148.58,2833.58 5213.5,2898.5 6261.5,2898.5 v1(6425,2735)
  Bottom Layer w10: v1(5000,2440) v1(5150,2440)
pads on no net: U1.1 U1.2 U1.4 U1.5 U1.13 U1.17 U1.20

## Polygon pours and split planes (outlines as drawn)
TEMP1_P on Top Layer "TEMP1_P_L01_P003" (solid, pour order 3): 5787.72,2520.14 5787.72,2490.14 5890,2490.14 5890,2520.14
TEMP1_N on Top Layer "TEMP1_N_L01_P002" (solid, pour order 2): 5787.72,2490 5787.72,2520 5620,2520 5620,2490
GND on Bottom Layer "GND_L02_P008" (solid, pour order 8): 4620,2860 4580,2820 4580,1440 4740,1280 5140,1280 5200,1340 5200,1840 5160,1880 4980,1880 4780,1880 4640,2020 4640,2760 4700,2820 4660,2860
GND on Bottom Layer "GND_L02_P009" (solid, pour order 9): 5140,1920 4800,1920 4660,2060 4660,2800 4700,2840 5160,2840 5260,2740 5260,2040
TEMP1_P on Bottom Layer "TEMP1_P_L02_P001" (solid, pour order 1): 5802.62,2520.14 5802.62,2490.14 5890,2490.14 5890,2520.14
TEMP1_N on Bottom Layer "TEMP1_N_L02_P000" (solid, pour order 0): 5772.81,2490 5772.81,2520 5620,2520 5620,2490

## Silkscreen, mask and mechanical layers (free items; w line width, h text height)
Top Solder:
  region: 5420,2869.65 6155,2869.65 6155,2139.65 5420,2139.65
Board Outline:
  circle w0.5: c6513.5,2843.94 r31.5
  lines w0.5: 4545,1260 4545,2913.54 6828.46,2913.54 6828.46,1260 4545,1260 ; 5366.39,2083.95 cw(c5366.39,2100.45) 5366.39,2116.95 6209.04,2116.95 cw(c6209.04,2100.45) 6209.04,2083.95 5366.39,2083.95 ; 5366.39,2172.82 ccw(c5382.89,2172.82) 5399.39,2172.82 5399.39,2835.35 ccw(c5382.89,2835.35) 5366.39,2835.35 5366.39,2172.82 ; 6176.04,2172.82 ccw(c6192.54,2172.82) 6209.04,2172.82 6209.04,2845.35 ccw(c6192.54,2845.35) 6176.04,2845.35 6176.04,2172.82 ; 6482.01,1476.54 ccw(c6513.5,1476.54) 6545,1476.54 6545,1515.91 ccw(c6513.5,1515.91) 6482.01,1515.91 6482.01,1476.54
Top Component Outline:
  lines w10: 15,2670 15,3465 ; 620,2670 620,3465
Mechanical 12:
  circle w0.25: c6696.27,18315.22 r0.12
  circle w0.25: c6696.27,17862.84 r0.12
  circle w0.25: c3468.03,17834.28 r0.12
DXF_TopKO:
  circle w10: c5787.72,2505.28 r18.03
  circle w0.5: c6690.67,2843.94 r29.53
  circle w0.5: c6690.67,2843.94 r29.53
  circle w0.5: c4816.38,2800.28 r29.53
  circle w0.5: c4698.27,2800.28 r29.53
  lines w0.5: 5366.39,2865.35 cw(c5382.89,2865.35) 5399.39,2865.35 ; 5433.39,2505.28 5453.07,2505.28 ; 6176.04,2865.35 cw(c6192.54,2865.35) 6209.04,2865.35 ; 4584.37,1299.37 4584.37,2874.17 ; 4584.37,1299.37 5273.35,1299.37 4584.37,1299.37 ; 4584.37,1299.37 4584.37,2874.17 ; 4584.37,2874.17 5273.35,2874.17 4584.37,2874.17 ; 5433.39,2150.94 6142.05,2150.94 ; 5433.39,2150.94 5433.39,2859.61 ; 5433.39,2150.94 6142.05,2150.94 ; 5433.39,2150.94 5433.39,2859.61 ; 5433.39,2859.61 6142.05,2859.61 ; 5433.39,2859.61 6142.05,2859.61 ; 6142.05,2150.94 6142.05,2859.61 ; 6142.05,2150.94 6142.05,2859.61
  lines w10: 5433.39,2150.94 6142.05,2859.61 ; 5433.39,2859.61 6142.05,2150.94
Mechanical 19:
  lines w1: 58.75,2330 58.75,2453.25 58.75,2508.5 ; 58.75,2508.25 58.75,2511.5 cw(c65.75,2511.5) 65.75,2518.5 cw(c65.75,2511.25) 73,2511.25 73,2508.5 ccw(c236.25,2508) 236,2344.75 241.5,2344.75 cw(c241.5,2337) 249.25,2337 cw(c242,2337) 242,2329.75 236,2329.75 59,2329.75 ; 59,2145.5 59,2200.75 59,2324 ; 59,2145.75 59,2142.5 ccw(c66,2142.5) 66,2135.5 ccw(c66,2142.75) 73.25,2142.75 73.25,2145.5 cw(c236.5,2146) 236.25,2309.25 241.75,2309.25 ccw(c241.75,2317) 249.5,2317 ccw(c242.25,2317) 242.25,2324.25 236.25,2324.25 59.25,2324.25
Mechanical 21:
  circle w5: c2086.61,3427.17 r118.11
  circle w5: c314.96,3427.17 r118.11
  circle w5: c669.29,3427.17 r118.11
  circle w5: c1023.62,3427.17 r118.11
  circle w5: c1377.95,3427.17 r118.11
  circle w5: c1732.28,3427.17 r118.11
  lines w1: 55.25,1783.46 276.25,1783.46 ; 61.75,2507.87 282.75,2507.87 ; 65,2145.67 286,2145.67 ; 236.22,1615.25 236.22,1956.5 ; 236.22,1976 236.22,2317.25 ; 236.22,2340 236.22,2681.25 ; 1907.75,1692.91 2093,1692.91 ; 1968.5,1612 1968.5,1787.5 ; 2099.5,1964.57 2385.5,1964.57 ; 2119,2326.77 2405,2326.77 ; 2171,2598.43 2275,2598.43 ; 2204.72,1790.75 2204.72,2148.25 ; 2204.72,2158 2204.72,2515.5 ; 2204.72,2531.75 2204.72,2684.5